# EAGLE board Helicopter Control Board copy (EAGLE 6.5.1)
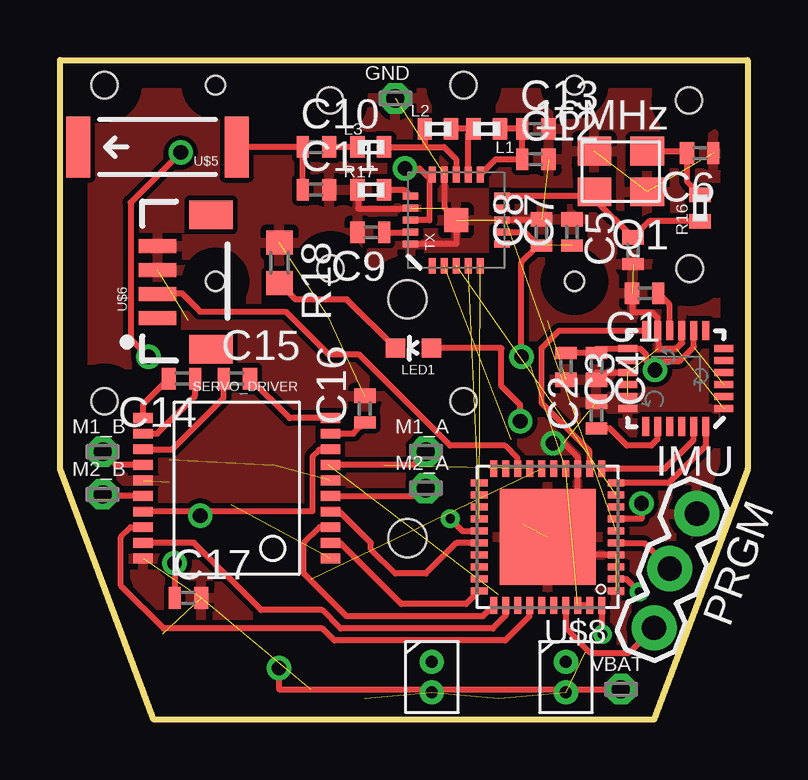
[diagram p0: board, top side]
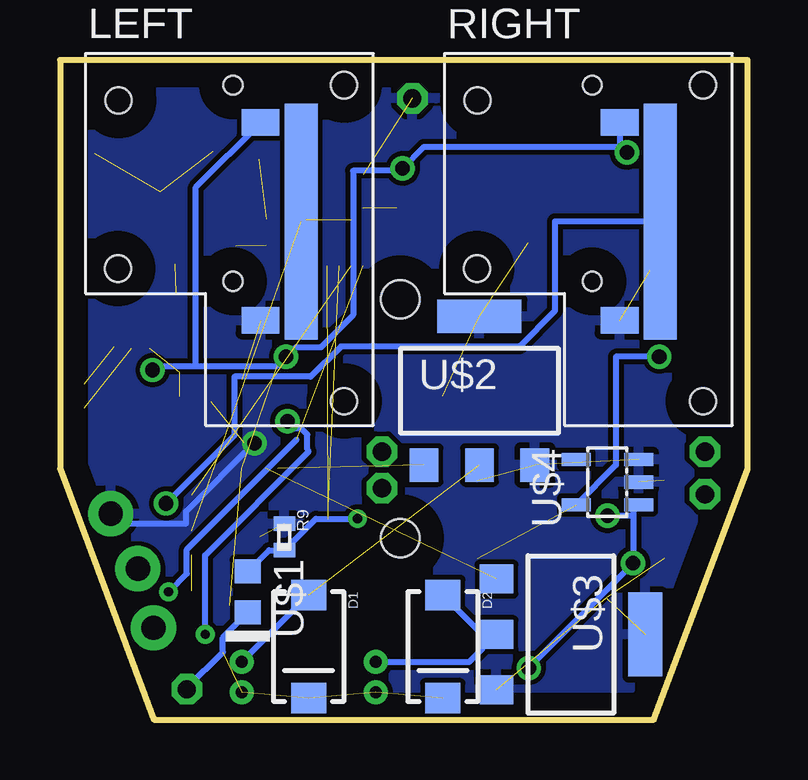
[diagram p1: board, bottom side, seen from below]

Size 28.65 x 27.51 mm. Coordinates in mm from the lower left corner, seen from the top.
Outline: 3.91,0 0,10.46 0,27.51 28.65,27.51 28.65,10.46 24.74,0 3.91,0
Copper layers (1*16): Top 0.035mm / dielectric 1.5mm / Bottom 0.035mm
Design rules "default": minimum track width 10mil, minimum drill 24mil, track to track 8mil, track to pad 8mil, pad to pad 8mil, via to via 8mil, smd to smd 8mil, copper to edge 40mil, drill to drill 8mil, minimum pad ring 10mil, minimum via ring 8mil, stop-mask expansion 4mil, vias tented up to drill 0mil, thermal gap 10mil
Holes 1.6 mm at 14.48,17.53 14.48,7.57

## Footprints (pad centres in the part's own frame; a part is rotated, then mirrored left to right if it is on the bottom)
C0402 = smd 0.5 x 0.9: 1 -0.55,0 | smd 0.6 x 0.9: 2 0.55,0
SMA-DIODE = smd 1.27 x 1.47: A -2.15,0; C 2.15,0
LSP10 = drill 0.762 octagon: MP 0,0
QFN-24-NP = smd 0.8 x 0.3: 1 -2,1.25; 2 -2,0.75; 3 -2,0.25; 4 -2,-0.25; 5 -2,-0.75; 6 -2,-1.25; 13 2,-1.25; 14 2,-0.75; 15 2,-0.25; 16 2,0.25; 17 2,0.75; 18 2,1.25 | smd 0.3 x 0.8: 7 -1.25,-2; 8 -0.75,-2; 9 -0.25,-2; 10 0.25,-2; 11 0.75,-2; 12 1.25,-2; 19 1.25,2; 20 0.75,2; 21 0.25,2; 22 -0.25,2; 23 -0.75,2; 24 -1.25,2
R0402 = smd 0.6 x 0.9: 1 -0.55,0; 2 0.55,0
LED-0603 = smd 0.8 x 0.8: A 0,-0.75; C 0,0.75
SURF_POT = smd 1.575 x 1.092: HI -1.702,4.128; LO -1.702,-4.128 | smd 1.372 x 9.83: OUT 0,0 | hole 1.092: 1.778,5.677; -7.62,5.042; 1.778,-7.493; -7.645,-1.968 | hole 0.787: -2.845,5.677; -2.845,-2.502
MOTOR_CONN = drill 0.5 pad 0.813: P$1 -0.635,0; P$2 0.635,0
1X03_LOCK = drill 1.016 pad 1.88: 1 0,0.127; 2 2.54,-0.127; 3 5.08,0.127
TXC-4SMD = smd 1.4 x 1.2: P1 -1.1,-0.85; P2 1.1,-0.85; P3 1.1,0.85; P4 -1.1,0.85
R0603 = smd 1 x 1.1: 1 -0.85,0; 2 0.85,0
SSOP_20 = smd 0.813 x 0.406: 1 -3.9,2.925; 2 -3.9,2.275; 3 -3.9,1.625; 4 -3.9,0.975; 5 -3.9,0.325; 6 -3.9,-0.325; 7 -3.9,-0.975; 8 -3.9,-1.625; 9 -3.9,-2.275; 10 -3.9,-2.925; 11 3.9,-2.925; 12 3.9,-2.275; 13 3.9,-1.625; 14 3.9,-0.975; 15 3.9,-0.325; 16 3.9,0.325; 17 3.9,0.975; 18 3.9,1.625; 19 3.9,2.275; 20 3.9,2.925
QFN20 = smd 1 x 1: 0 0,0 | smd 0.65 x 0.3: 1 -1.9,1; 2 -1.9,0.5; 3 -1.9,0; 4 -1.9,-0.5; 5 -1.9,-1; 11 1.9,-1; 12 1.9,-0.5; 13 1.9,0; 14 1.9,0.5; 15 1.9,1 | smd 0.3 x 0.65: 6 -1,-1.9; 7 -0.5,-1.9; 8 0,-1.9; 9 0.5,-1.9; 10 1,-1.9; 16 1,1.9; 17 0.5,1.9; 18 0,1.9; 19 -0.5,1.9; 20 -1,1.9
ZENER_0603 = smd 1 x 1.1: A -0.85,0; C 0.85,0
PG-SOT-223 = smd 1.2 x 1.4: 1 -2.311,-3.099; 2 0,-3.099; 3 2.311,-3.099 | smd 3.5 x 1.4: 4 0,3.099
SOT23-DBV = smd 0.55 x 1.2: 1 -0.95,-1.3; 2 0,-1.3; 3 0.95,-1.3; 4 0.95,1.3; 5 -0.95,1.3
ANTENNA-CHIP5 = smd 1.016 x 2.54: FEED -3.302,0; NC 3.302,0
JST-4-SMD-VERT-1.0MM = smd 0.6 x 1.55: 1 -1.54,1.27; 2 -0.54,1.27; 3 0.46,1.27; 4 1.46,1.27 | smd 1.2 x 1.8: P$1 -2.84,-0.955; P$2 2.76,-0.955
RHA40 = smd 0.7 x 0.3: 1 -2.85,2.25; 2 -2.85,1.75; 3 -2.85,1.25; 4 -2.85,0.75; 5 -2.85,0.25; 6 -2.85,-0.25; 7 -2.85,-0.75; 8 -2.85,-1.25; 9 -2.85,-1.75; 10 -2.85,-2.25; 21 2.85,-2.25; 22 2.85,-1.75; 23 2.85,-1.25; 24 2.85,-0.75; 25 2.85,-0.25; 26 2.85,0.25; 27 2.85,0.75; 28 2.85,1.25; 29 2.85,1.75; 30 2.85,2.25 | smd 0.3 x 0.7: 11 -2.25,-2.85; 12 -1.75,-2.85; 13 -1.25,-2.85; 14 -0.75,-2.85; 15 -0.25,-2.85; 16 0.25,-2.85; 17 0.75,-2.85; 18 1.25,-2.85; 19 1.75,-2.85; 20 2.25,-2.85; 31 2.25,2.85; 32 1.75,2.85; 33 1.25,2.85; 34 0.75,2.85; 35 0.25,2.85; 36 -0.25,2.85; 37 -0.75,2.85; 38 -1.25,2.85; 39 -1.75,2.85; 40 -2.25,2.85 | smd 4 x 4: TP 0,0

## Placement (x,y rotation side)
C1  .1uF  [C0402]  24.38,17.78 180 top
C2  2.2nF  [C0402]  22.35,12.7 90 top
C3  .1uF  [C0402]  21.08,14.73 270 top
C4  10nF  [C0402]  22.35,14.73 270 top
C5  22pF  [C0402]  23.88,19.56 90 top
C6  22pF  [C0402]  26.67,23.62 180 top
C7  1nF  [C0402]  21.34,20.32 90 top
C8  10nF  [C0402]  20.07,20.32 90 top
C9  33nF  [C0402]  12.95,20.32 180 top
C10  1.5pF  [C0402]  10.67,23.88 0 top
C11  1pF  [C0402]  10.67,22.1 0 top
C12  2.2nF  [C0402]  19.81,23.37 0 top
C13  4.7pF  [C0402]  19.81,24.64 0 top
C14  .1uF  [C0402]  5.08,14.22 180 top
C15  .1uF  [C0402]  7.37,14.22 0 top
C16  .1uF  [C0402]  12.7,12.95 90 top
C17  .1uF  [C0402]  5.33,5.08 0 top
D1  [SMA-DIODE]  18.29,3.05 270 bottom
D2  [SMA-DIODE]  12.7,3.05 270 bottom
GND  LSP10  [LSP10]  13.97,25.91 0 top
IMU  [QFN-24-NP]  25.65,14.22 180 top
L1  2.7nH  [R0402]  17.78,24.64 180 top
L2  8.2nH  [R0402]  15.75,24.64 0 top
L3  3.9nH  [R0402]  12.95,23.88 0 top
LED1  [LED-0603]  14.73,15.49 90 top
LEFT  SURF_POT  [SURF_POT]  18.59,20.78 0 bottom
M1_A  LSP10  [LSP10]  15.24,11.18 0 top
M1_B  LSP10  [LSP10]  1.78,11.18 0 top
M2_A  LSP10  [LSP10]  15.24,9.65 0 top
M2_B  LSP10  [LSP10]  1.78,9.4 0 top
MTR0  MOTOR_CONN  [MOTOR_CONN]  15.49,1.78 270 top
MTR1  MOTOR_CONN  [MOTOR_CONN]  21.08,1.78 270 top
PRGM  [1X03_LOCK]  26.42,8.64 249.5 top
Q1  16MHz  [TXC-4SMD]  23.37,22.86 180 top
R9  [R0402]  19.3,7.62 270 bottom
R16  1M  [R0402]  26.67,21.34 90 top
R17  22k  [R0402]  12.95,22.1 0 top
R18  50  [R0603]  9.14,19.05 270 top
RIGHT  SURF_POT  [SURF_POT]  3.63,20.78 0 bottom
SERVO_DRIVER  MPC17531A  [SSOP_20]  7.37,9.65 180 top
TX  NRF24L01SMD  [QFN20]  16.51,20.83 90 top
U$1  ZENER_0603  [ZENER_0603]  20.83,5.33 270 bottom
U$2  BSP75N  [PG-SOT-223]  11.18,13.72 0 bottom
U$3  BSP75N  [PG-SOT-223]  7.37,3.56 270 bottom
U$4  LP5907_2.8V  [SOT23-DBV]  5.84,9.91 90 bottom
U$5  ANTENNA2SMD5  [ANTENNA-CHIP5]  4.06,23.88 180 top
U$6  JST_4_VERTICAL  [JST-4-SMD-VERT-1.0MM]  5.33,18.29 90 top
U$8  G2955IRHA40R  [RHA40]  20.32,7.62 180 top
VBAT  LSP10  [LSP10]  23.37,1.27 0 top

## Library data of the parts
C1-C17 L1-L3 R9 R16-R18 = resistor
D1 D2 = SparkFun-DiscreteSemi
GND M1_A M1_B M2_A M2_B VBAT = solpad
IMU = SparkFun-Sensors
LED1 = SparkFun-LED; PROD_ID: DIO-08575; VALUE: BLUE
LEFT MTR0 MTR1 Q1 RIGHT = CPE329
PRGM U$6 = SparkFun-Connectors
SERVO_DRIVER = freescale
TX U$5 = SparkFun-RF
U$1 = formula electric
U$2 U$3 = infineon
U$4 = texas
U$8 = TI_MSP430_v16

## Nets
A6: R9.2 U$1.A U$8.25
B_MTR0: U$3.1 U$8.16
B_MTR1: U$2.1 U$8.17
BODY_LED: U$6.2 U$8.18
GND: C1.2 C2.2 C3.2 C4.2 C5.1 C6.1 C7.2 C8.2 C9.2 C11.2 C12.2 C13.2 C16.2 C17.2 GND.MP IMU.1 IMU.9 IMU.11 IMU.15 IMU.17 IMU.18 LEFT.LO PRGM.1 Q1.P2 Q1.P4 R9.1 R17.1 R18.1 RIGHT.LO SERVO_DRIVER.6 SERVO_DRIVER.15 SERVO_DRIVER.20 TX.0 TX.8 TX.14 TX.17 TX.20 U$2.3 U$2.4 U$3.3 U$3.4 U$4.2 U$4.3 U$6.3 U$6.4 U$8.1 U$8.4 U$8.13 U$8.TP
LEFT_POT_OUT: LEFT.OUT U$8.6
M1_CTRLA: SERVO_DRIVER.2 U$8.30
M1_CTRLB: SERVO_DRIVER.3 U$8.31
M2_CTRLA: SERVO_DRIVER.19 U$8.32
M2_CTRLB: SERVO_DRIVER.18 U$8.34
N$1: M1_A.MP SERVO_DRIVER.7
N$3: M1_B.MP SERVO_DRIVER.14
N$4: TX.3 U$8.9
N$5: TX.4 U$8.23
N$6: TX.5 U$8.24
N$7: M2_A.MP SERVO_DRIVER.5
N$8: IMU.12 U$8.12
N$9: IMU.23 U$8.11
N$10: C1.1 IMU.10
N$11: C2.1 IMU.20
N$12: M2_B.MP SERVO_DRIVER.16
N$13: C14.1 SERVO_DRIVER.12
N$14: C14.2 SERVO_DRIVER.11
N$15: C15.1 SERVO_DRIVER.13
N$17: C10.2 L3.1
N$18: D1.A MTR1.P$1 U$2.2
N$19: D2.A MTR0.P$1 U$3.2
N$20: IMU.24 U$8.10
N$21: C6.2 Q1.P1 R16.2
N$22: C5.2 Q1.P3 R16.1 TX.10
N$23: C9.1 TX.19
N$24: R17.2 TX.16
N$25: L1.2 L2.2 TX.12
N$26: C12.1 C13.1 L1.1 TX.11
N$27: L2.1 L3.2 TX.13
N$28: C10.1 C11.1 U$5.FEED
N$29: TX.2 U$8.2
N$30: C15.2 SERVO_DRIVER.10
N$31: LED1.A U$8.40
N$32: LED1.C R18.2
N$33: C16.1 SERVO_DRIVER.9
PSAVE: SERVO_DRIVER.4 U$8.26
RIGHT_POT_OUT: RIGHT.OUT U$8.7
RST: PRGM.2 U$8.5
TEST: PRGM.3 U$8.37
VBAT: C17.1 D1.C D2.C MTR0.P$2 MTR1.P$2 SERVO_DRIVER.8 SERVO_DRIVER.17 U$1.C U$4.1 VBAT.MP
VCC: C3.1 C4.1 C7.1 C8.1 IMU.3 IMU.8 IMU.13 LEFT.HI RIGHT.HI SERVO_DRIVER.1 TX.7 TX.15 TX.18 U$4.5 U$8.14 U$8.38 U$8.39

## Tracks (layer width: path | path; a pad name or v marks a point on that pad's centre or on a via)
A6  (via drill 0.38)
  Top 0.254: v16.26,8.38 16.77,7.87 U$8.25
  Bottom 0.254: U$1.A 19.94,7.07 R9.2 17.99,8.38 v16.26,8.38
B_MTR0  (1 unrouted)
B_MTR1  (1 unrouted)
BODY_LED
  Top 0.254: U$6.2 4.1,17.78 5.08,17.78 5.84,17.02 9.4,17.02 11.18,15.24 12.45,15.24 16.26,11.43 18.54,11.43 19.07,10.9 U$8.18
GND  (via drill 0.61)  (23 unrouted)
  Top 0.254: U$8.4 23.16,6.88 20.4,6.88 20.4,7.52 U$8.TP 21.57,8.87 U$8.13 21.57,10.59 21.57,10.95 20.98,11.53 v20.55,11.53 | C1.2 23.85,17.78 23.85,16.99 24.66,16.99 24.89,16.76 24.89,16.23 IMU.11 24.92,16.1 24.92,15.47 25.68,15.47 25.91,15.7 25.91,16.2 IMU.9 | TX.17 14.61,21.31 12.42,21.31 12.42,22.1 R17.1 | TX.8 20.07,20.83 C8.2 | C4.2 22.35,14.48 IMU.15 | TX.20 14.63,19.84 16.51,19.84 TX.0 16.43,20.93 16.03,21.34 16.03,22.71 TX.14 | U$6.3 | U$6.3 4.01,18.85 4.06,18.85 | 4.06,18.77 U$6.3
  Bottom 0.254: v20.55,11.53 23.39,8.69 23.39,8.18 26.11,8.18 26.52,8.59 PRGM.1
  pour Bottom: 0,27.43 28.7,27.43 28.7,10.41 24.64,0 4.06,0 0,10.41
  pour Top: 0,27.43 28.7,27.43 28.7,10.67 24.64,0 4.06,0 0,10.41
LEFT_POT_OUT  (1 unrouted)
M1_CTRLA
  Top 0.254: U$8.30 16.93,4.83 14.22,4.83 11.68,7.37 11.28,7.37 SERVO_DRIVER.2
M1_CTRLB
  Top 0.254: U$8.31 17.62,4.32 11.94,4.32 10.16,6.1 10.16,7.37 10.82,8.03 SERVO_DRIVER.3
M2_CTRLA
  Top 0.254: U$8.32 18.57,4.35 18.03,3.81 11.68,3.81 10.92,4.57 8.38,4.57 5.58,7.38 SERVO_DRIVER.19
M2_CTRLB
  Top 0.254: SERVO_DRIVER.18 2.95,8.03 2.54,7.62 2.54,5.59 4.32,3.81 10.92,3.81 11.43,3.3 18.54,3.3 19.56,4.32 19.56,4.76 U$8.34
N$1
  Top 0.254: M1_A.MP 14.69,10.63 SERVO_DRIVER.7
N$3
  Top 0.254: SERVO_DRIVER.14 2.33,10.63 M1_B.MP
N$4  (1 unrouted)
N$5  (1 unrouted)
N$6  (1 unrouted)
N$7
  Top 0.254: SERVO_DRIVER.5 14.91,9.33 M2_A.MP
N$8
  Top 0.254: U$8.12 22.07,11.2 20.07,13.21 20.07,15.49 20.8,16.22 IMU.12
N$9
  Top 0.254: U$8.11 25.2,10.47 26.4,11.67 IMU.23
N$10
  Top 0.254: IMU.10 25.4,17.31 C1.1
N$11
  Top 0.254: IMU.20 24.89,11.68 24.64,11.43 23.62,11.43 22.9,12.15 C2.1
N$12
  Top 0.254: SERVO_DRIVER.16 1.85,9.33 M2_B.MP
N$13
  Top 0.254: SERVO_DRIVER.12 4.05,11.93 5.63,13.5 C14.1
N$14
  Top 0.254: SERVO_DRIVER.11 3.47,13.16 C14.2
N$15
  Top 0.254: SERVO_DRIVER.13 4.67,11.28 6.82,13.42 C15.1
N$17
  Top 0.254: L3.1 C10.2
N$18  (1 unrouted)
  Bottom 0.254: MTR1.P$1 D1.A
N$19
  Bottom 0.254: MTR0.P$1 11.61,2.41 U$3.2 11.06,3.56 D2.A
N$20
  Top 0.254: IMU.24 26.9,11.41 25.36,9.87 U$8.10
N$21
  Top 0.254: Q1.P1 26.03,23.71 C6.2 26.12,22.44 R16.2
N$22
  Top 0.254: R16.1 24.55,20.79 C5.2 22.27,21.72 Q1.P3 22.09,21.83 TX.10
N$23
  Top 0.254: C9.1 TX.19
N$24
  Top 0.254: R17.2 14.34,22.1 TX.16
N$25
  Top 0.254: L2.2 L1.2 17.01,24.42 TX.12
N$26
  Top 0.254: TX.11 18.15,23.37 C12.1 C13.1 L1.1
N$27
  Top 0.254: L3.2 15.24,23.88 | 15.24,23.88 16,23.88 16.51,23.37 TX.13 | L2.1 15.2,23.92 15.24,23.88
N$28
  Top 0.254: C11.1 C10.1 U$5.FEED
N$29  (via drill 0.38)  (1 unrouted)
  Top 0.254: U$8.2 23.59,5.87 v24.13,5.33
  Bottom 0.254: v24.13,5.33 23.37,6.1 23.37,7.11 18.8,11.68
N$30
  Top 0.254: SERVO_DRIVER.10 9.56,12.58 C15.2
N$31  (via drill 0.38, 0.61)
  Top 0.254: U$8.40 22.57,3.59 v22.61,3.56 | LED1.A 18.39,15.49 18.39,13.92 19.18,13.13 v19.18,12.45
  Bottom 0.254: v22.61,3.56 22.61,6.86 18.29,11.18 18.34,11.28 18.34,11.89 18.59,12.14 18.87,12.14 v19.18,12.45
N$32
  Top 0.254: LED1.C 11.95,17.53 9.82,17.53 R18.2
N$33
  Top 0.254: SERVO_DRIVER.9 12.22,11.93 C16.1
PSAVE
  Top 0.254: U$8.26 16.51,7.37 15.24,6.1 13.97,6.1 12.95,7.11 12.95,7.37 11.64,8.68 SERVO_DRIVER.4
RIGHT_POT_OUT  (via drill 0.61)
  Top 0.254: v24.23,9.02 24.23,8.38 23.19,8.38 U$8.7
  Bottom 0.254: v24.23,9.02 21.39,11.86 21.39,14.3 18.21,14.3 16.94,15.57 9.5,15.57 8.03,17.04 8.03,20.78 RIGHT.OUT
RST
  Top 0.254: U$8.5 24.34,7.37 PRGM.2
TEST
  Top 0.254: U$8.37 21.07,3.82 22.1,2.79 23.72,2.79 PRGM.3
VBAT  (via drill 0.61)  (4 unrouted)
  Top 0.254: v4.78,6.53 C17.1 | 5.84,8.69 10.52,8.69 10.52,10.97 10.79,11.25 11.25,11.25 SERVO_DRIVER.8 | 5.84,8.69 SERVO_DRIVER.17 | v5.84,8.51 5.84,8.69 | VBAT.MP 9.12,1.27 v9.12,2.16
  Bottom 0.254: VBAT.MP 23.37,1.32 21.87,2.82 21.87,3.43 U$1.C | 4.78,8.51 4.78,8.94 4.55,8.94 U$4.1 | 4.78,8.51 v4.78,6.53 4.85,6.43 v9.12,2.16 | v5.84,8.51 4.78,8.51
VCC  (via drill 0.61)  (5 unrouted)
  Top 0.254: TX.7 19.38,20.32 19.91,19.79 20.07,19.79 C8.1 19.84,19.68 19.23,19.07 v19.23,15.14 | 24.79,14.96 24.41,14.96 24.41,15.24 24.18,15.47 23.77,15.47 IMU.13 22.35,15.47 C4.1 22.25,15.29 21.08,15.29 C3.1 | 24.79,14.96 25.83,14.96 26.42,15.54 26.42,16.2 IMU.8 | 24.79,14.96 v24.79,14.58 | TX.18 15.39,20.83 15.39,22.61 | 15.39,22.61 15.49,22.71 TX.15 | v3.68,15.14 2.95,15.88 2.95,21.57 v5.03,23.65 | v14.38,22.99 14.99,22.99 15.29,22.68 15.39,22.61 | U$8.38 21.59,4.78 22.05,4.78 U$8.39
  Bottom 0.254: 22.99,14.76 24.61,14.76 v24.79,14.58 | 22.99,14.76 19.61,14.76 v19.23,15.14 19.13,15.21 18.82,15.52 17.78,15.52 16.43,16.87 16.43,22.89 14.45,22.89 v14.38,22.99 13.49,23.88 5.44,23.88 v5.03,23.65 5.33,23.95 RIGHT.HI | 22.99,14.76 22.99,22.2 LEFT.HI | v3.68,15.14 5.49,15.14 5.49,10.62 U$4.5